# Altium PCB PMSM_G474V1.0.PcbDoc (part 1 of 2)
Units mil, origin at the board's own origin, x right, y up, seen from the top; angles counter-clockwise.
Board outline 1968.5 x 3149.61 mil, 4 copper layers (Top Layer, VCC, GND, Bottom Layer), stack 23.756 mil thick; 166 components, 95 nets, 523 pads, 254 vias.
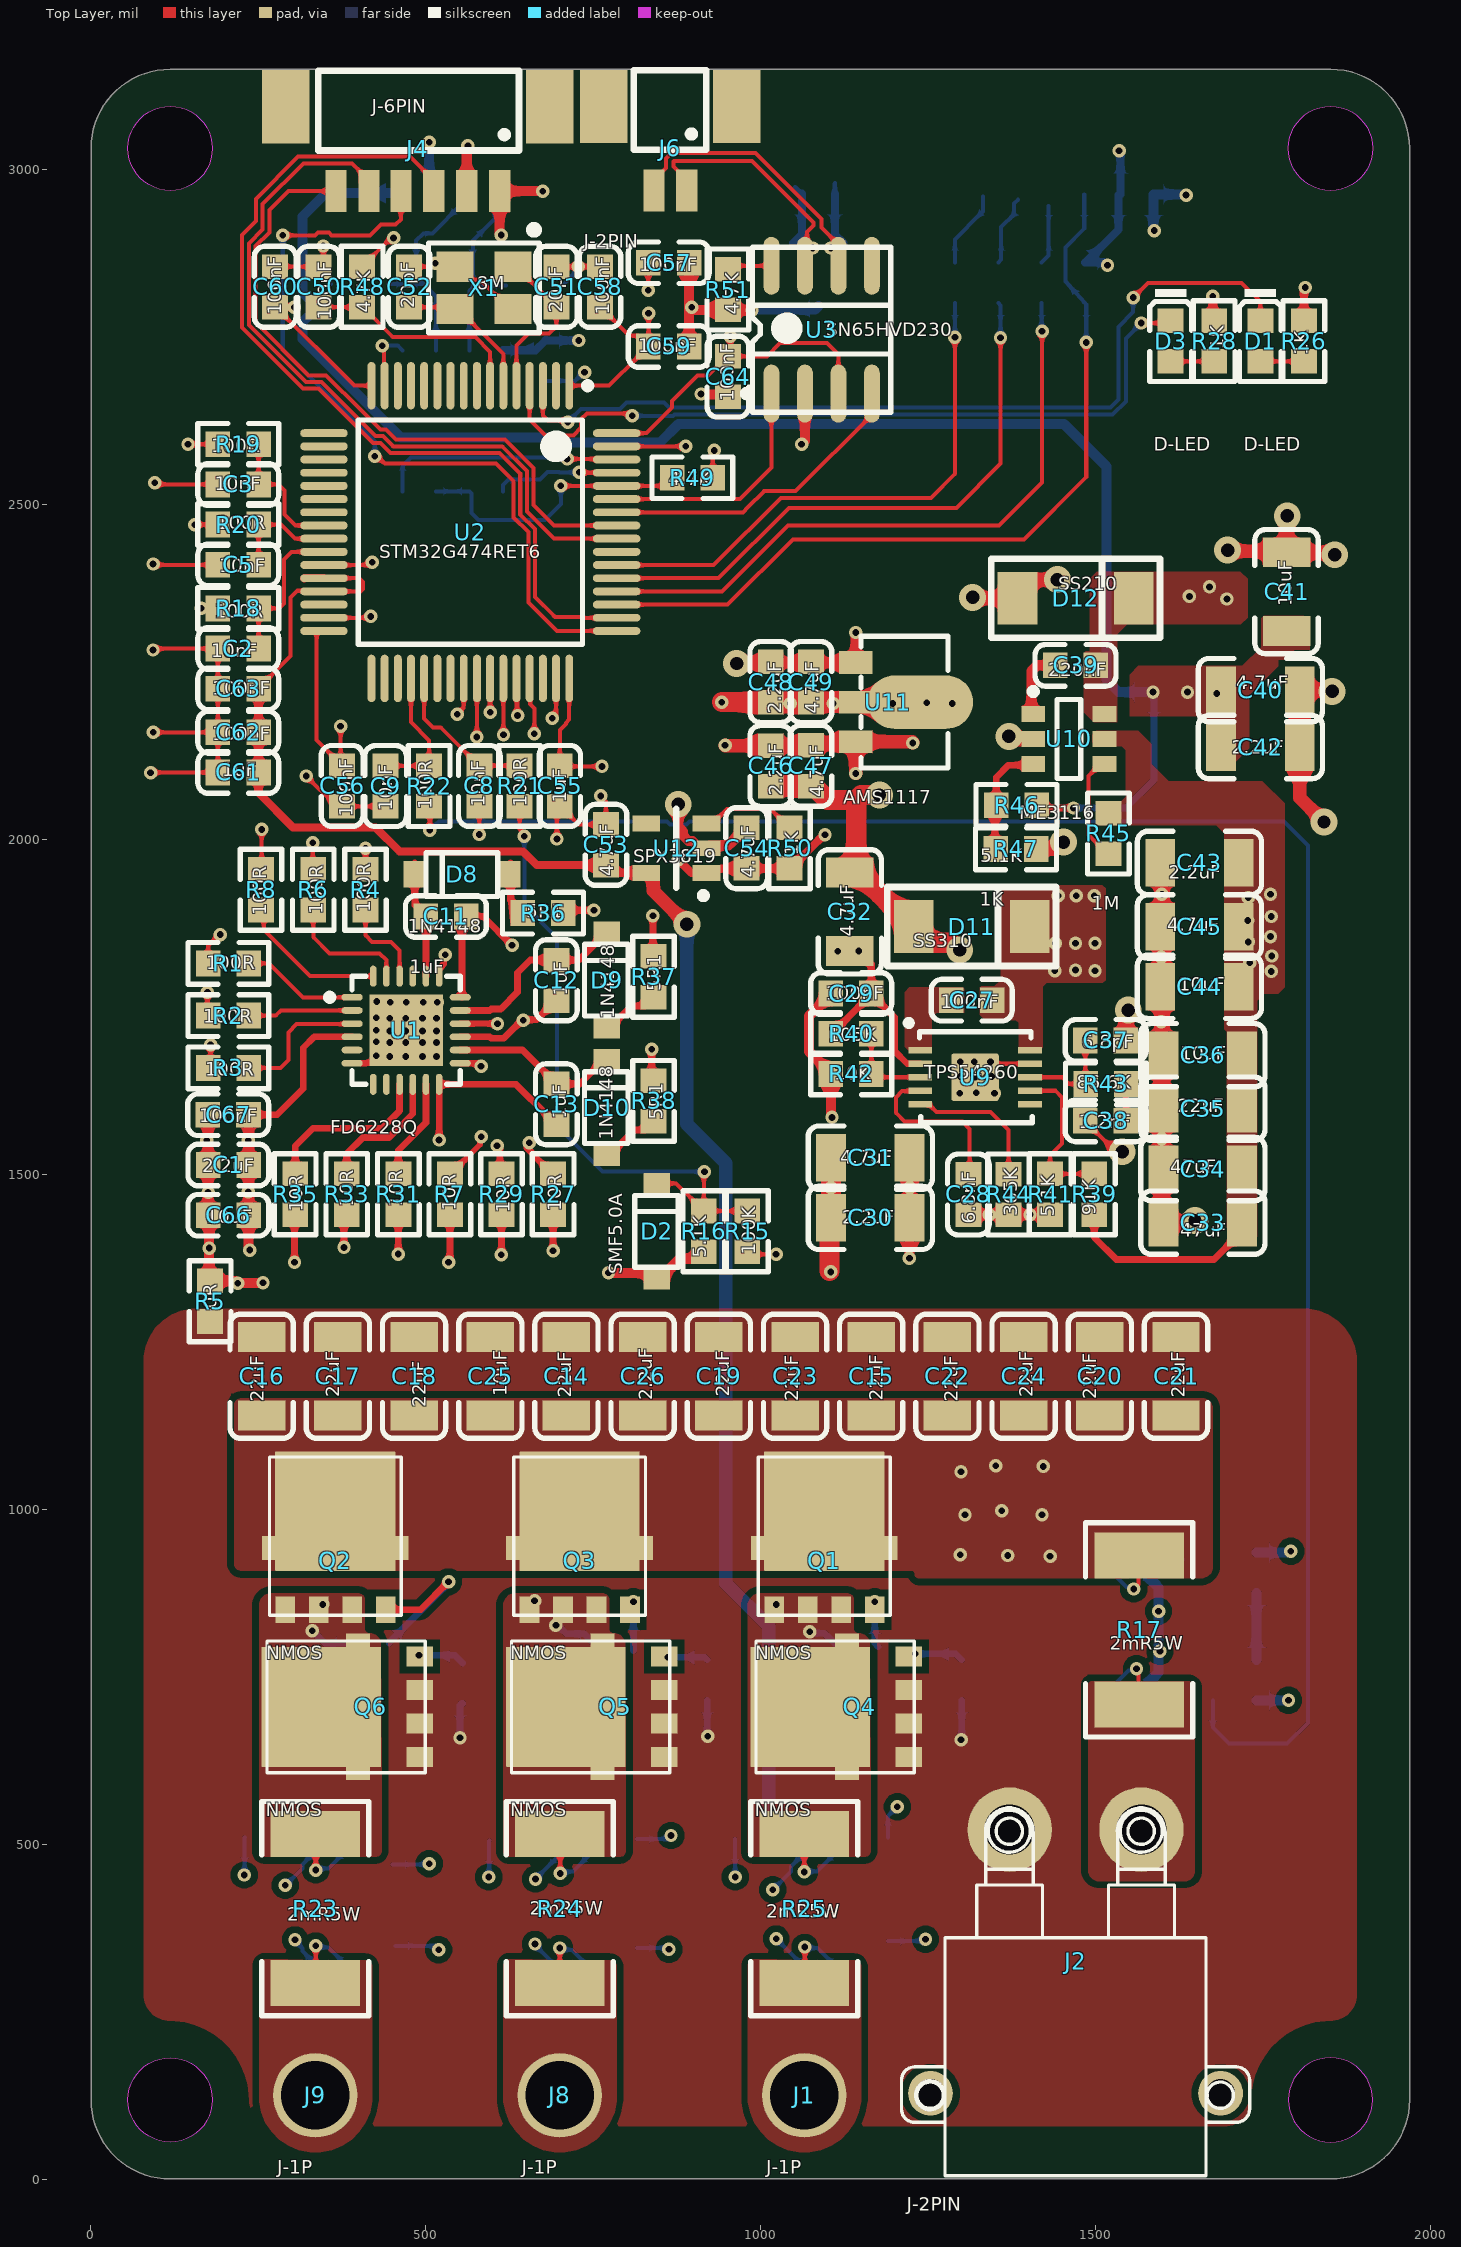
[diagram p0: Top Layer view]
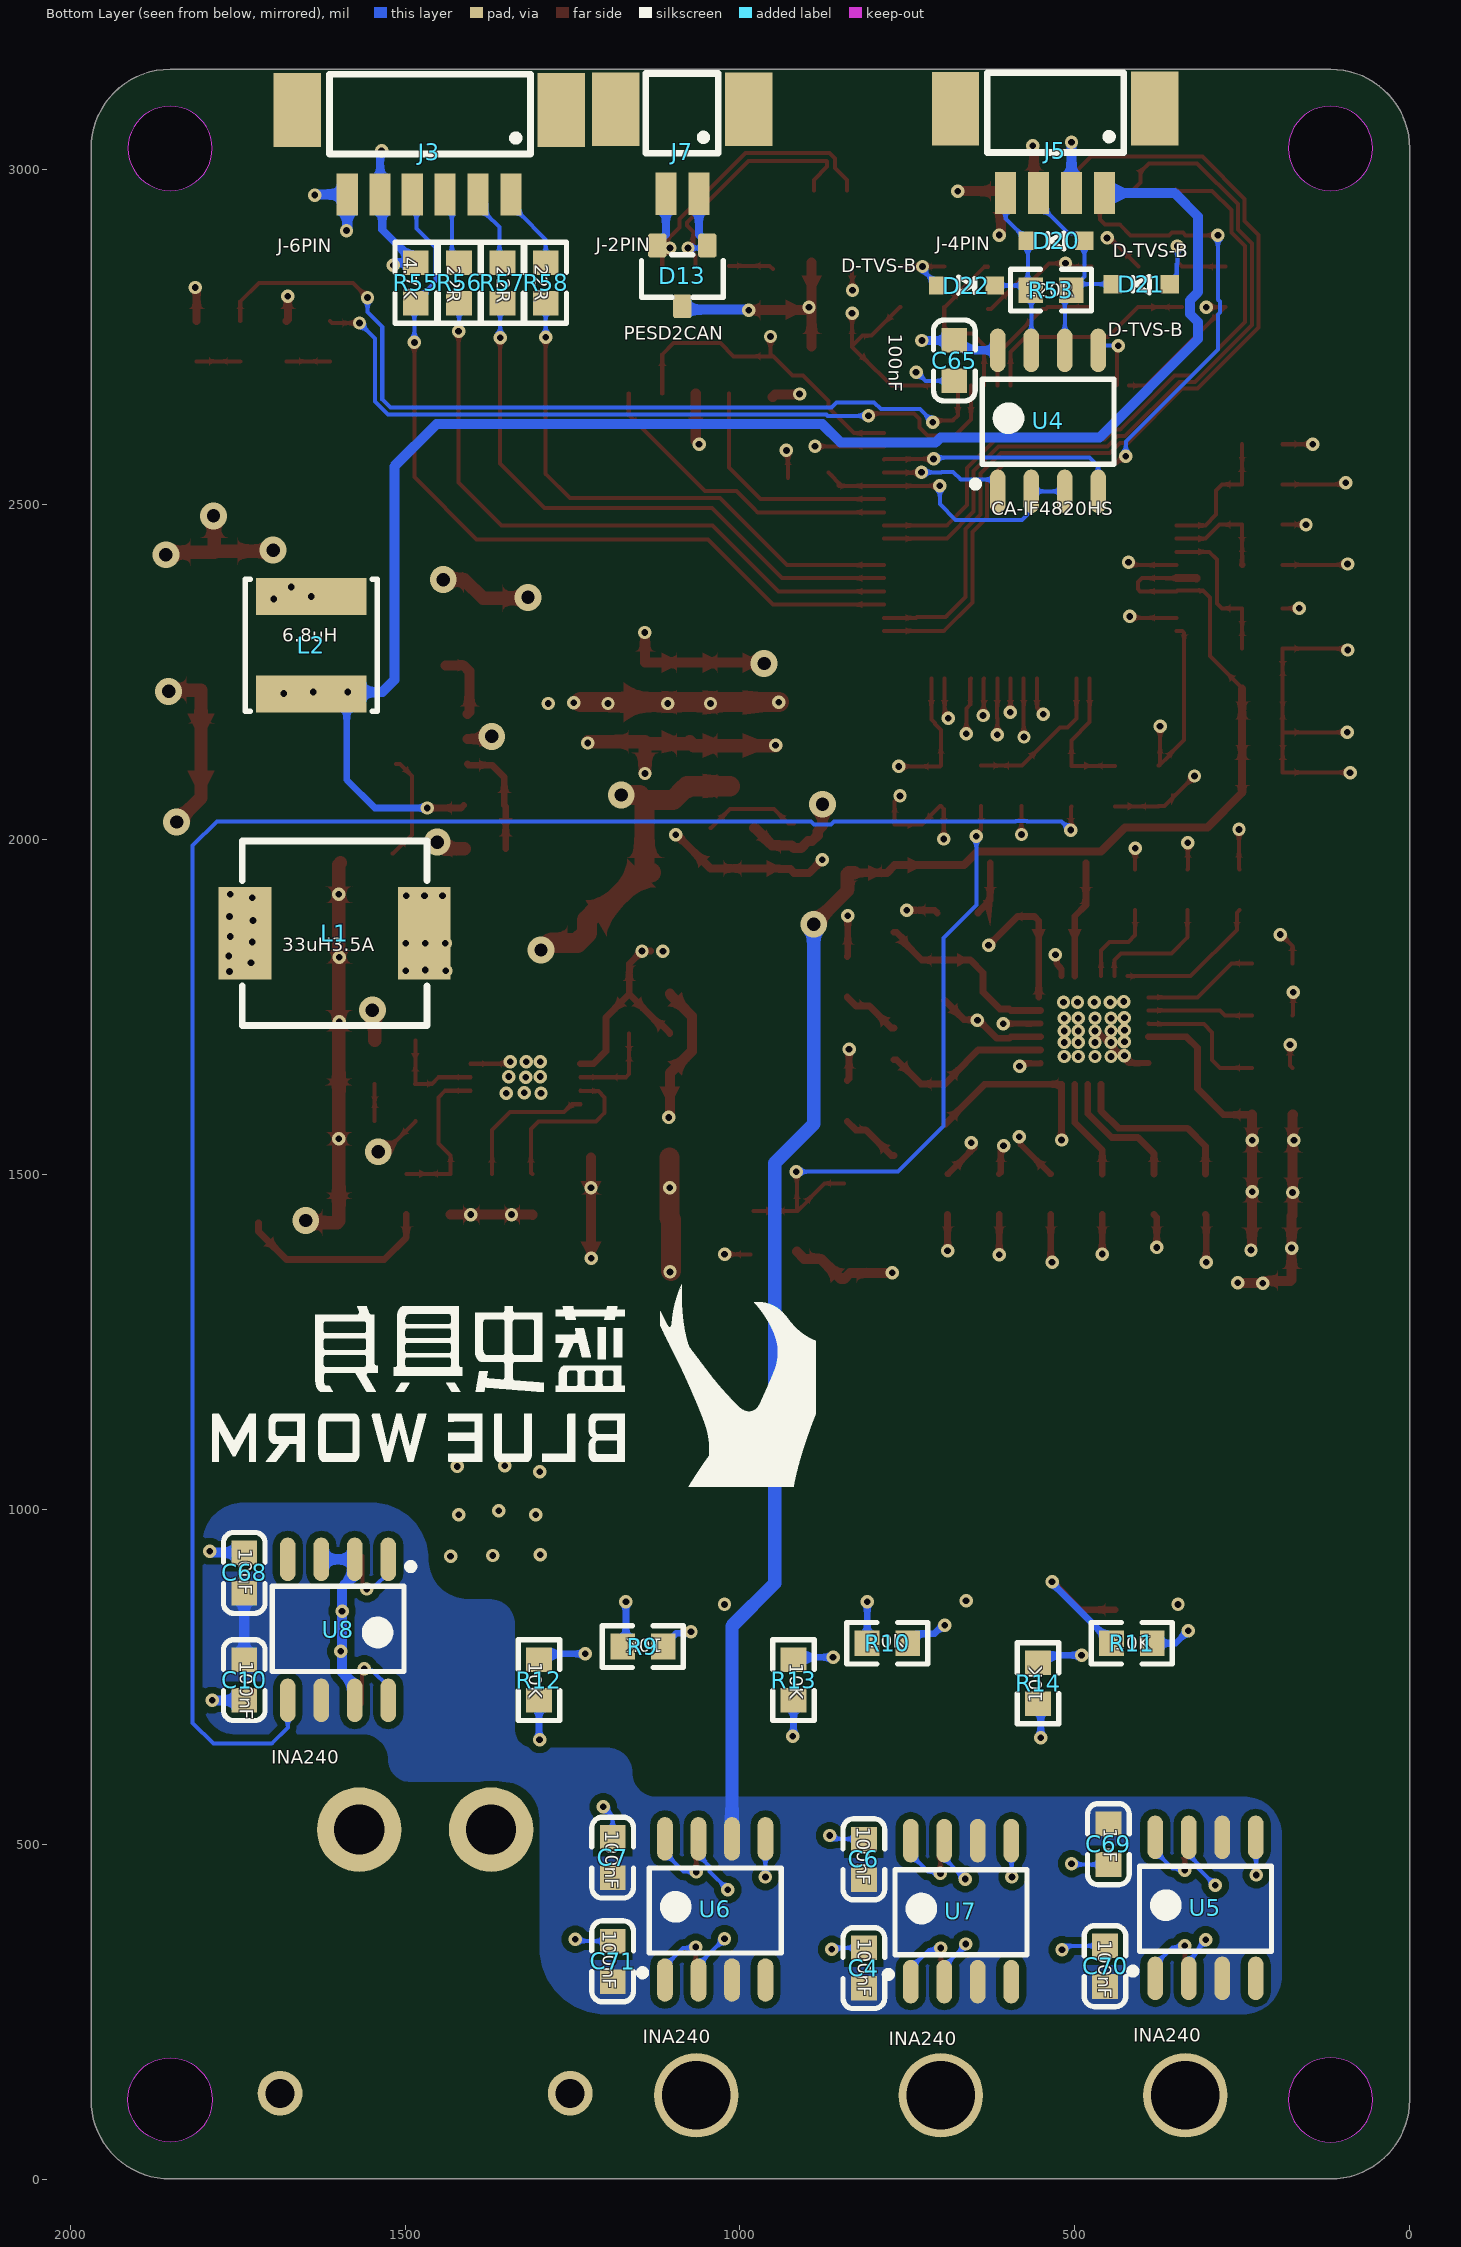
[diagram p1: Bottom Layer view, seen from below]
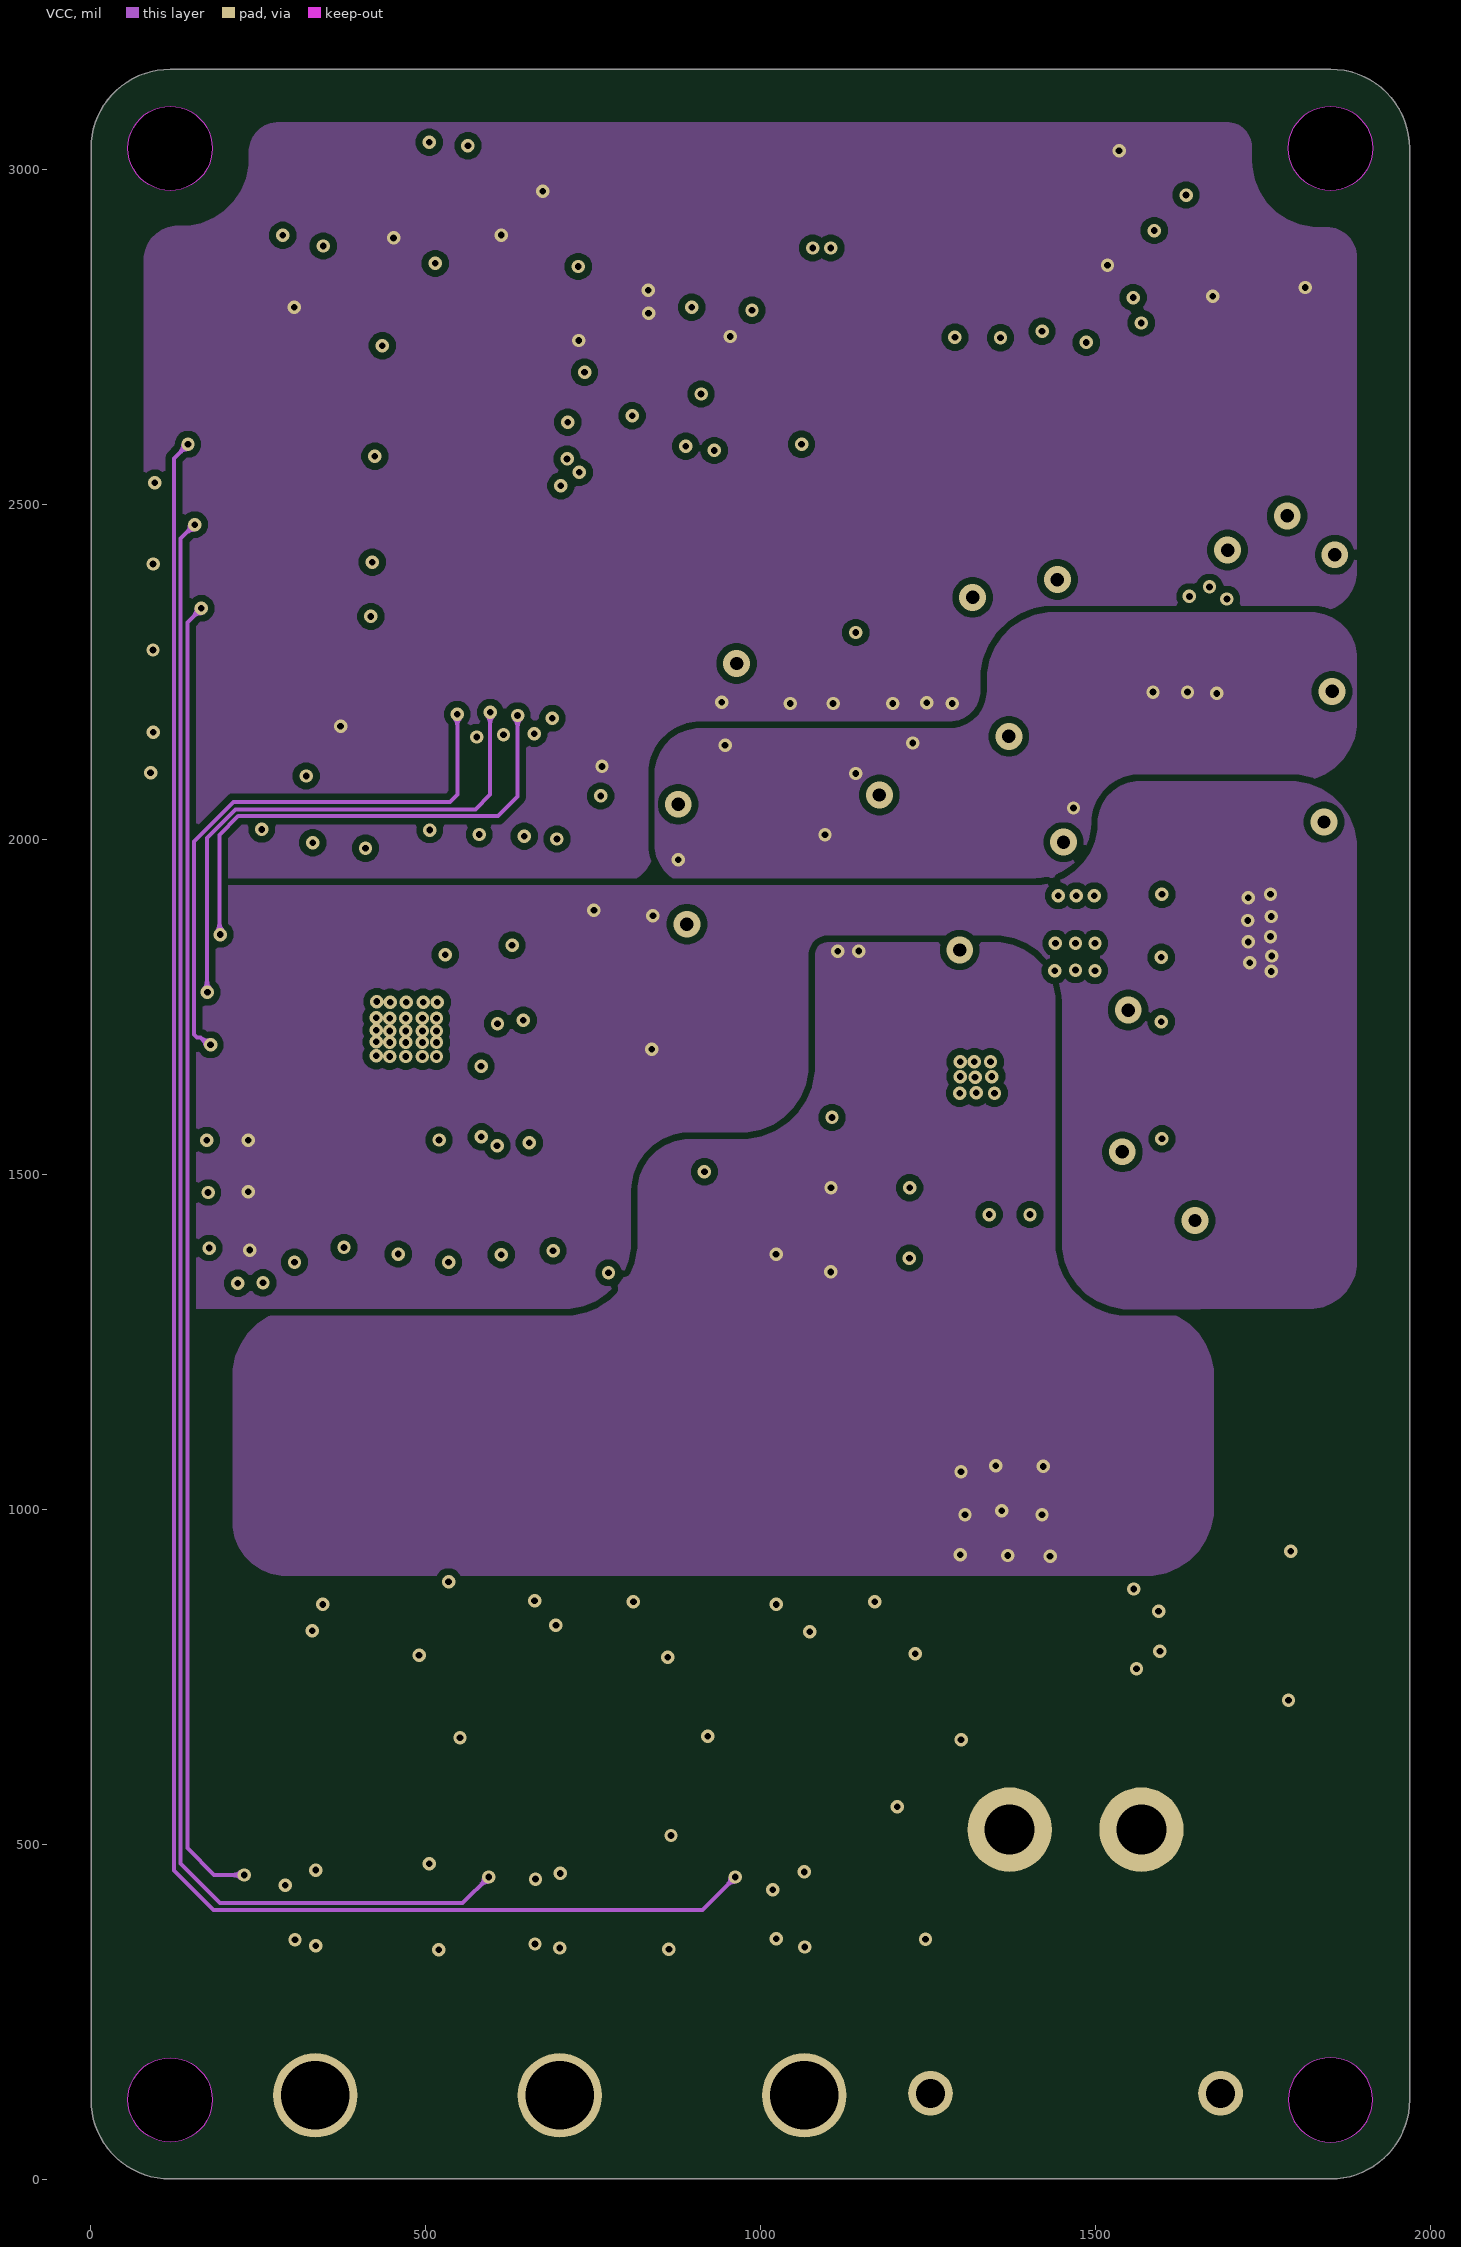
[diagram p2: VCC]
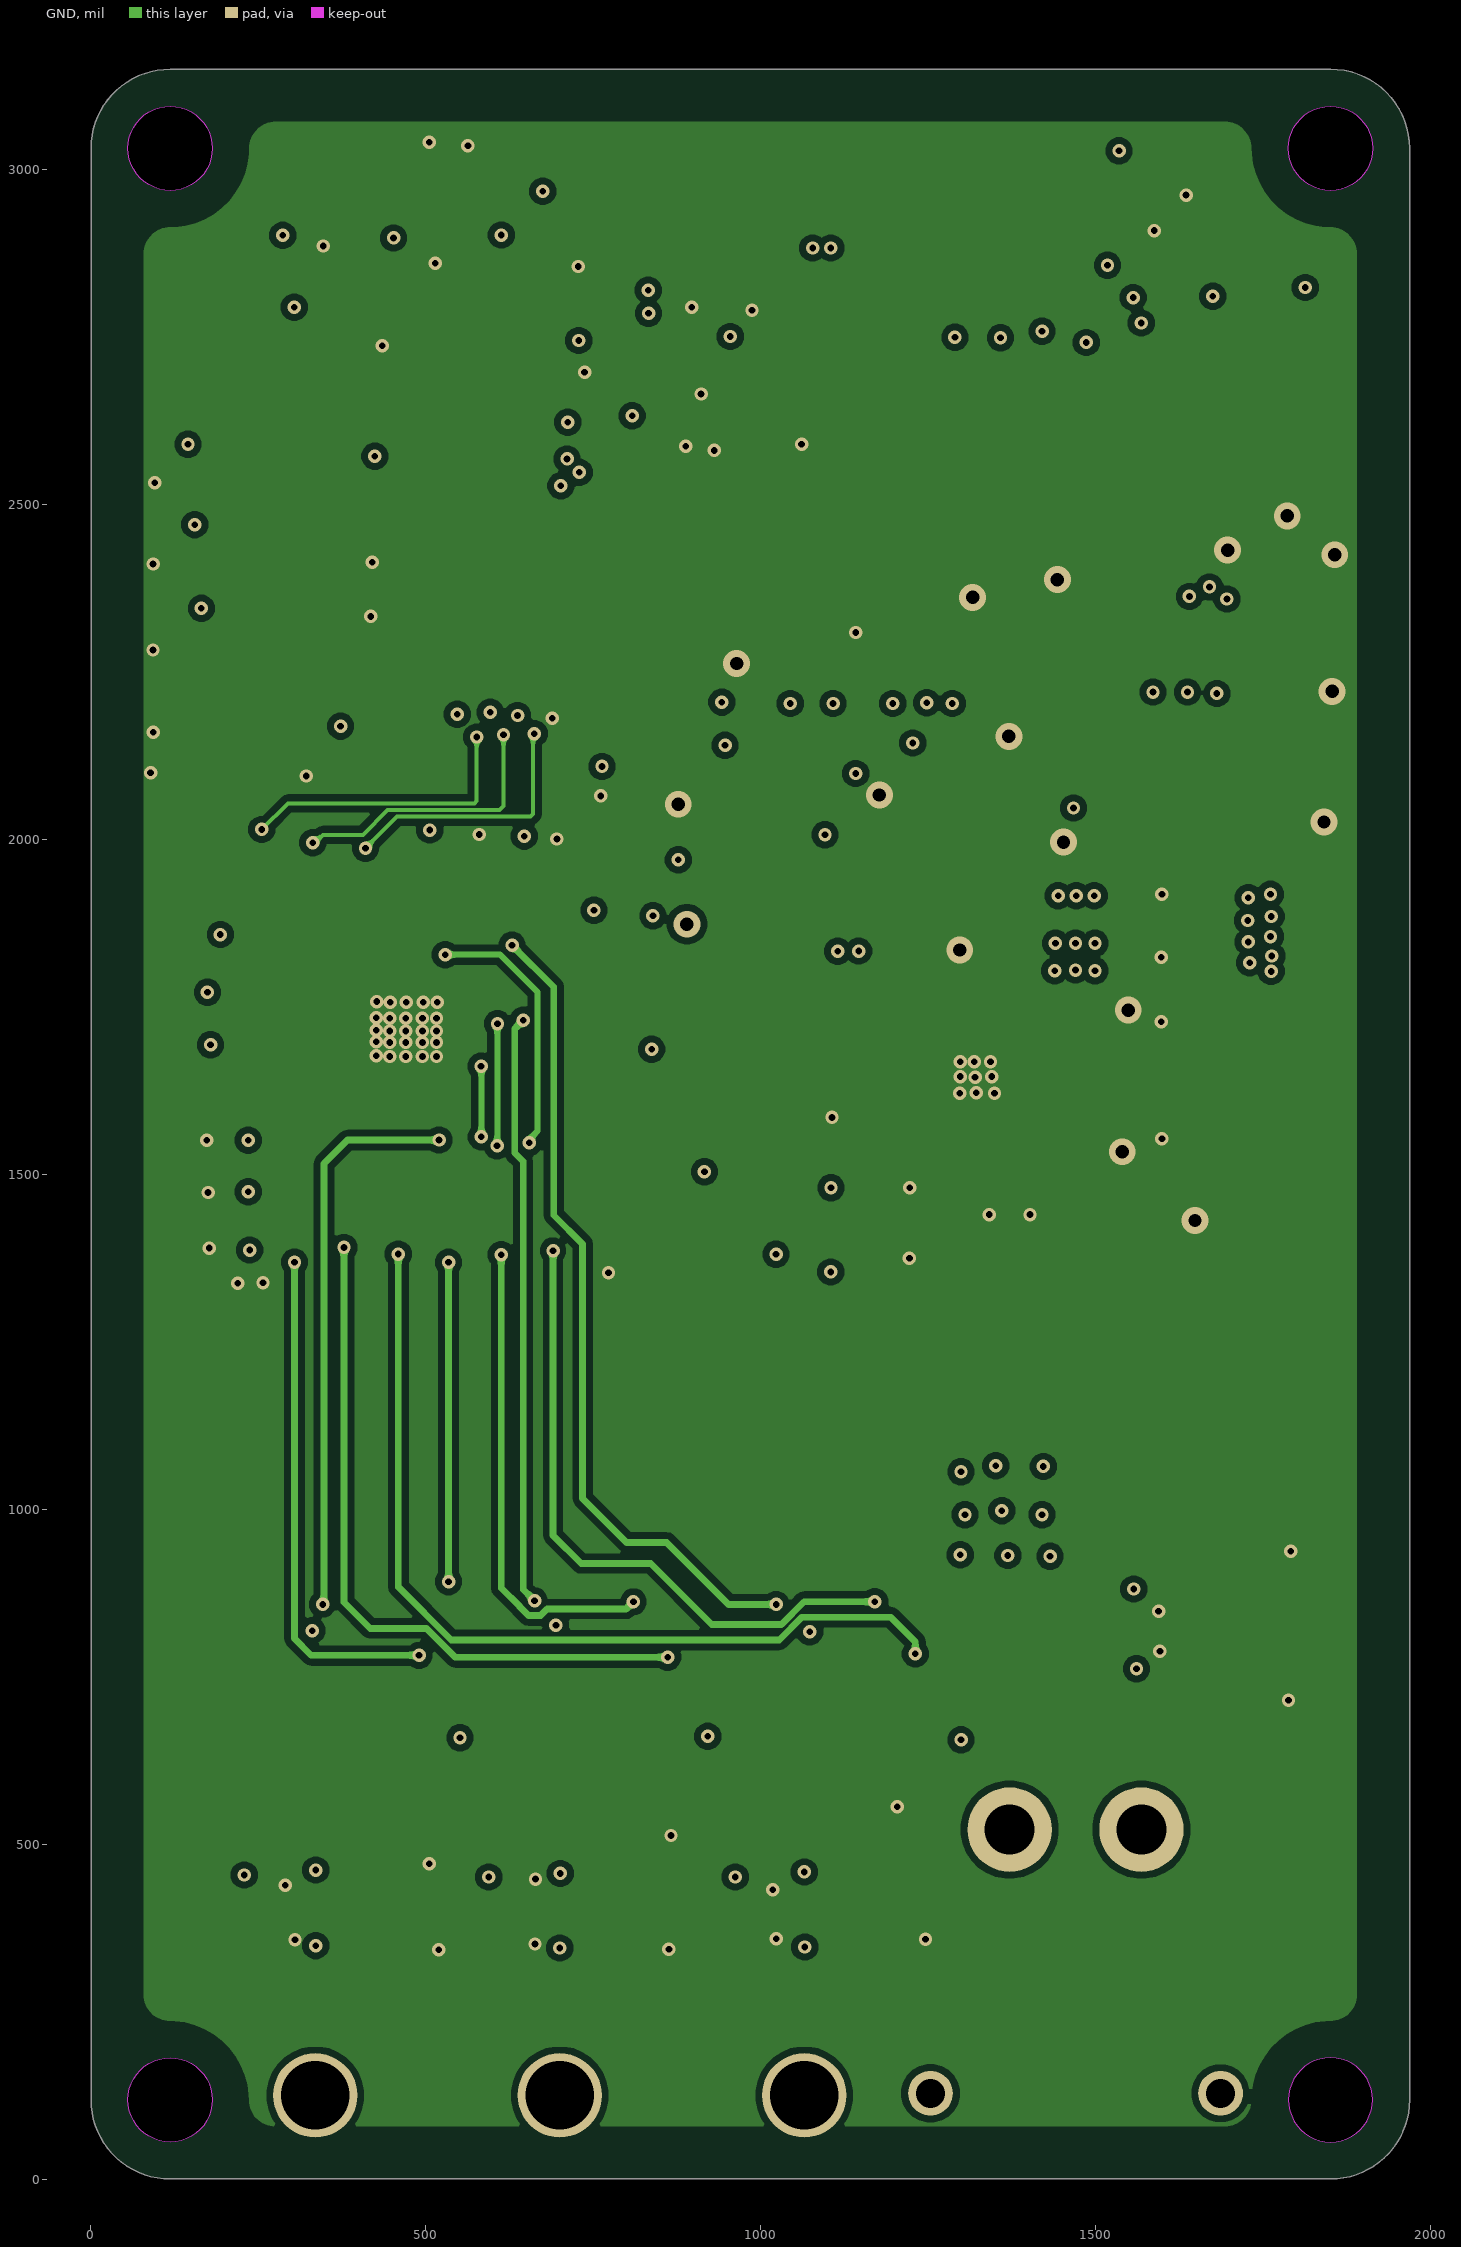
[diagram p3: GND]
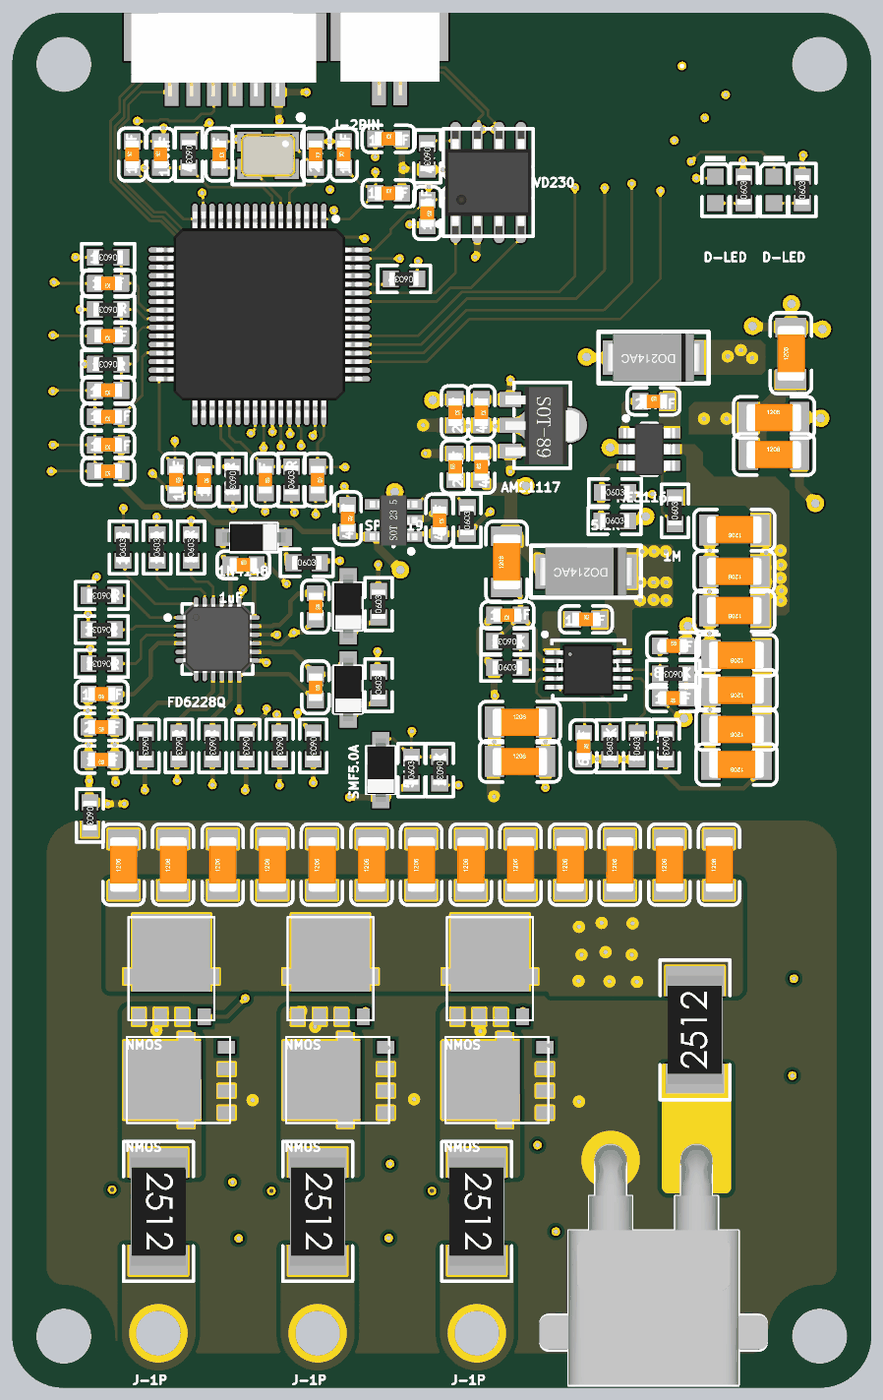
[diagram p5: 3D render of the assembled board from above, using the file's embedded part models]
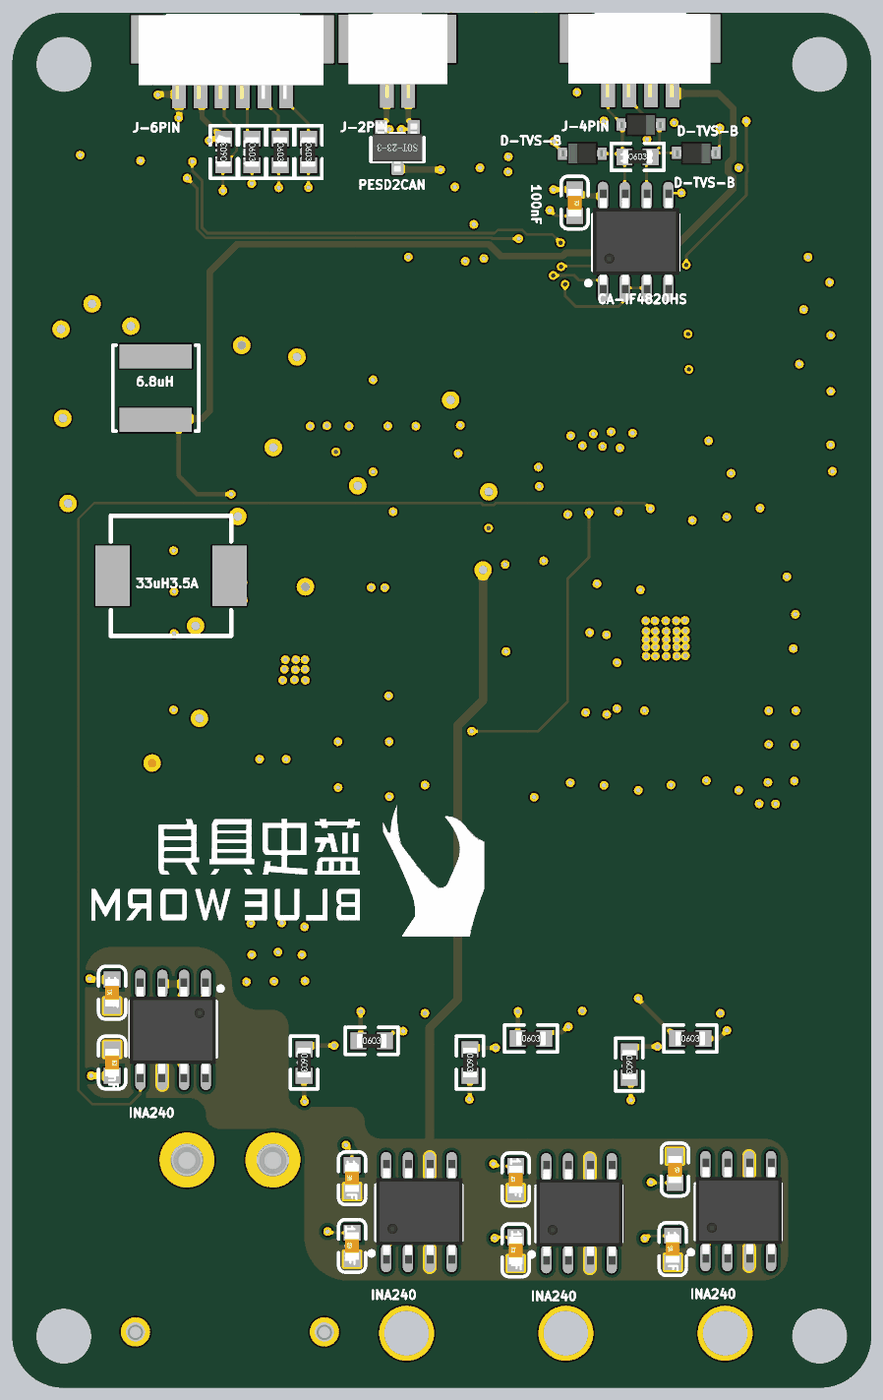
[diagram p6: 3D render of the assembled board from below, using the file's embedded part models]

## Layer stack, top to bottom
Top Solder: solder mask 0.4, Solder Resist, Dk 3.5
Top Layer: signal copper 1.4
Dielectric 2: prepreg 2.8, PP-006, Dk 4.1
VCC: signal copper 1.378
Dielectric 1: dielectric 12.6, FR-4, Dk 4.8
GND: signal copper 1.378
Dielectric 3: prepreg 2.8, PP-006, Dk 4.1
Bottom Layer: signal copper 1.4
Bottom Solder: solder mask 0.4, Solder Resist, Dk 3.5

## Board outline
0.25,118.36 0.25,3031.75 cw(c118.36,3031.75) 118.36,3149.86 1850.64,3149.86 cw(c1850.64,3031.75) 1968.75,3031.75 1968.75,118.36 cw(c1850.64,118.36) 1850.64,0.25 118.36,0.25 cw(c118.36,118.36)
cut-out: 1850.64,2968.75 cw(c1850.64,3031.75) 1787.65,3031.75 cw(c1850.64,3031.75) 1850.64,3094.74 cw(c1850.64,3031.75) 1913.64,3031.75 cw(c1850.64,3031.75)
cut-out: 1787.65,118.36 ccw(c1850.64,118.36) 1850.64,55.37 ccw(c1850.64,118.36) 1913.64,118.36 ccw(c1850.64,118.36) 1850.64,181.35 ccw(c1850.64,118.36)
cut-out: 118.36,2968.75 cw(c118.36,3031.75) 55.37,3031.75 cw(c118.36,3031.75) 118.36,3094.74 cw(c118.36,3031.75) 181.35,3031.75 cw(c118.36,3031.75)
cut-out: 118.36,55.37 cw(c118.36,118.36) 55.37,118.36 cw(c118.36,118.36) 118.36,181.35 cw(c118.36,118.36) 181.35,118.36 cw(c118.36,118.36)

## Design rules (kind name [scope] priority, off if disabled: settings)
Clearance [All] p1: gap=7 ignorepadtopadclearanceinfootprint=TRUE except(4: Arc-Arc Arc-Track Track-Track; 10: Arc-Poly Track-Poly SMDPad-Poly THPad-Poly Via-Poly Fill-Poly Poly-Poly Poly-Region Poly-Text Poly-Hole)
DiffPairsRouting [All] p1: maxlimit=10 minlimit=5.5 mostfreqgap=5.5 toplayer_minwidth=4.5 toplayer_maxwidth=20 toplayer_prefwidth=4.5 midlayer1_minwidth=4.5 midlayer1_maxwidth=20 midlayer1_prefwidth=4.5 midlayer2_maxgap=8 midlayer2_minwidth=4.5 midlayer2_maxwidth=4.5 midlayer2_prefwidth=4.5 bottomlayer_minwidth=4.5 bottomlayer_maxwidth=20 bottomlayer_prefwidth=4.5 maxuncoupledlength=500
HoleSize [All] p1: absolutevalues=TRUE maxlimit=10000 minlimit=0 maxpercent=80.000 minpercent=20.000
HoleToHoleClearance [All] p1: gap=0 allowstackedmicrovias=TRUE
MinimumSolderMaskSliver [All] p1: minsoldermaskwidth=0
PlaneConnect [All] p1: planeconnectstyle=Direct reliefexpansion=20 reliefentries=4 reliefconductorwidth=10 reliefairgap=10
PolygonConnect [All] p1: connectstyle=Direct reliefconductorwidth=10 reliefentries=4 polygonreliefangle="90 Angle" airgapwidth=10
RoutingVias [All] p1: holewidth=8 width=16 viastyle="Through Hole" minholewidth=8 minwidth=16 maxholewidth=1333 maxwidth=2000
SilkToSilkClearance [All] p1: silktosilkclearance=0
SilkToSolderMaskClearance [IsPad] p1: minsilkscreentomaskgap=0 clearancetoexposedcopper=TRUE
SolderMaskExpansion [All] p1: expansion=4 istentingtop=FALSE
SupplyNets "Schematic Supply Nets_7" [InNet('PGND')] p1: voltage=0.000
SupplyNets "Schematic Supply Nets_6" [InNet('5V')] p2: voltage=0.000
SupplyNets "Schematic Supply Nets_5" [InNet('GND')] p3: voltage=0.000
SupplyNets "Schematic Supply Nets_4" [InNet('AD_3V3')] p4: voltage=0.000
SupplyNets "Schematic Supply Nets_3" [InNet('15V')] p5: voltage=0.000
SupplyNets "Schematic Supply Nets_2" [InNet('VBAT')] p6: voltage=0.000
SupplyNets "Schematic Supply Nets_1" [InNet('3V3')] p7: voltage=0.000
SupplyNets "Schematic Supply Nets" [InNet('VIN')] p8: voltage=0.000
Width [All] p1: maxlimit=4111 minlimit=4 preferedwidth=10
23 further rules are at their usual default settings.

## Classes and differential pairs
differential pair MCU_CAN: +MCU_CAN_P -MCU_CAN_N
differential pair CAN: +CAN_P -CAN_N

## Components (designator, comment, footprint, x,y, rotation, side; value= is the part's Value field where it differs from the comment)
C1 "2.2uF" C-0603 205.32,1514 r180 top
C2 "10nF" C-0603 220,2285 r180 top
C3 "10nF" C-0603 220,2530 r180 top
C4 "100nF" C-0603 815,315 r90 bottom
C5 "10nF" C-0603 220,2410 r180 top
C6 "100nF" C-0603 815,477.43 r90 bottom
C7 "100nF" C-0603 1190,480 r90 bottom
C8 "10nF" C-0603 580,2080 r270 top
C9 "10nF" C-0603 440,2079.68 r270 top
C10 "100nF" C-0603 1740,745 r270 bottom
C11 "1uF" C-0603 530,1885 r0 top
C12 "1uF" C-0603 695,1789.68 r270 top
C13 "1uF" C-0603 695,1604.68 r270 top
C14 "22uF" C-1206 710,1198.66 r90 top
C15 "22uF" C-1206 1165,1198.66 r90 top
C16 "22uF" C-1206 255,1198.66 r90 top
C17 "22uF" C-1206 368.75,1198.66 r90 top
C18 "22uF" C-1206 482.5,1198.66 r90 top
C19 "22uF" C-1206 937.5,1198.66 r90 top
C20 "22uF" C-1206 1506.25,1198.66 r90 top
C21 "22uF" C-1206 1620,1198.66 r90 top
C22 "22uF" C-1206 1278.75,1198.66 r90 top
C23 "22uF" C-1206 1051.25,1198.66 r90 top
C24 "22uF" C-1206 1392.5,1198.66 r90 top
C25 "10uF" C-1206 596.25,1198.66 r90 top
C26 "2.2uF" C-1206 823.75,1198.66 r90 top
C27 "100nF" C-0603 1315,1760 r0 top
C28 "6.8nF" C-0603 1310,1470 r270 top
C29 "100nF" C-0603 1135,1770 r180 top
C30 "2.2uF" C-1206 1163.66,1435 r0 top
C31 "4.7uF" C-1206 1163.66,1525 r0 top
C32 "4.7uF" C-1206 1133,1892 r90 top
C33 "47uF" C-1206 1660,1428 r180 top
C34 "47uF" C-1206 1660,1508 r180 top
C35 "22uF" C-1206 1660,1598 r180 top
C36 "10uF" C-1206 1660,1678 r180 top
C37 "6.8pF" C-0603 1515,1700 r0 top
C38 "1.2nF" C-0603 1515,1580 r180 top
C39 "220nF" C-0603 1470,2260 r0 top
C40 "4.7uF" C-1206 1746,2223 r0 top
C41 "10uF" C-1206 1785,2370 r90 top
C42 "2.2uF" C-1206 1746,2138 r0 top
C43 "2.2uF" C-1206 1655,1965 r180 top
C44 "10uF" C-1206 1655,1780 r180 top
C45 "4.7uF" C-1206 1655,1870 r180 top
C46 "2.2uF" C-0603 1015,2109.68 r90 top
C47 "4.7uF" C-0603 1075,2110 r90 top
C48 "2.2uF" C-0603 1015,2235 r270 top
C49 "4.7uF" C-0603 1075,2235 r270 top
C50 "100nF" C-0603 339.96,2825 r90 top
C51 "20pF" C-0603 695,2825 r270 top
C52 "20pF" C-0603 475,2825 r270 top
C53 "4.7uF" C-0603 769,1992 r270 top
C54 "4.7uF" C-0603 979,1987 r270 top
C55 "1uF" C-0603 700,2080 r270 top
C56 "100nF" C-0603 375,2080 r270 top
C57 "100nF" C-0603 862.68,2861 r0 top
C58 "100nF" C-0603 760,2825 r90 top
C59 "100nF" C-0603 862.68,2736 r0 top
C60 "100nF" C-0603 275,2825 r90 top
C61 "1uF" C-0603 220,2100 r180 top
C62 "100nF" C-0603 220,2160 r180 top
C63 "100nF" C-0603 220,2225 r180 top
C64 "100nF" C-0603 951,2691 r270 top
C65 "100nF" C-0603 680,2715 r270 bottom
C66 "10uF" C-0603 205.32,1439 r180 top
C67 "100nF" C-0603 205,1589 r180 top
C68 "10uF" C-0603 1740,905 r90 bottom
C69 "1uF" C-0603 450,500 r270 bottom
C70 "100nF" C-0603 455,317.89 r90 bottom
C71 "100nF" C-0603 1190,325.15 r90 bottom
D1 "D-LED" D-LED-0603Blue 1746,2744 r270 top
D2 "SMF5.0A" D-SOD-123 845,1415 r270 top
D3 "D-LED" D-LED-0603Blue 1612,2744 r270 top
D8 "1N4148" D-SOD-123 554,1948 r0 top
D9 "1N4148" D-SOD-123 770,1790 r270 top
D10 "1N4148" D-SOD-123 770,1599.68 r270 top
D11 "SS310" DO-214AC(SMA) 1315,1870 r180 top
D12 "SS210" DO-214AC(SMA) 1470,2360 r180 top
D13 "PESD2CAN" SOT-233 1086,2841 r0 bottom
D20 "D-TVS-B" D-SOD-323 528,2894 r0 bottom
D21 "D-TVS-B" D-SOD-323 401,2829 r0 bottom
D22 "D-TVS-B" D-SOD-323 662,2827 r180 bottom
J1 "J-1P" PAD-1 1065,125 r0 top
J2 "J-2PIN" J-XT30-2P-F 1470,325 r0 top
J3 "J-6PIN" J-GH-6P 1464,3026 r0 bottom
J4 "J-6PIN" J-GH-6P 488,3031 r180 top
J5 "J-4PIN" J-GH-4P 388.89,2979.2 r0 bottom
J6 "J-2PIN" J-GH-2P 865,3032 r180 top
J7 "J-2PIN" J-GH-2P 1086,3027 r0 bottom
J8 "J-1P" PAD-1 700,125 r0 top
J9 "J-1P" PAD-1 335,125 r0 top
L1 "33uH3.5A" L-SMD-7.0*7.0 1605,1860 r0 bottom
L2 "6.8uH" L-SMD-5.0*5.0*4.0 1640,2290 r270 bottom
Q1 "NMOS" "SO-8FL  5*6" 1095,960 r0 top
Q2 "NMOS" "SO-8FL  5*6" 365,960 r0 top
Q3 "NMOS" "SO-8FL  5*6" 729.51,960 r0 top
Q4 "NMOS" "SO-8FL  5*6" 1111.05,705 r90 top
Q5 "NMOS" "SO-8FL  5*6" 746.05,705 r90 top
Q6 "NMOS" "SO-8FL  5*6" 381.05,705 r90 top
R1 "100R" R-0603 205.32,1815 r180 top
R2 "100R" R-0603 205.32,1737 r180 top
R3 "100R" R-0603 205.32,1659 r180 top
R4 "100R" R-0603 410,1925 r90 top
R5 "0R" R-0603 178,1310.69 r270 top
R6 "100R" R-0603 332,1925 r90 top
R7 "10R" R-0603 536,1470.32 r270 top
R8 "100R" R-0603 254,1925 r90 top
R9 "10K" R-0603 1145,795 r180 bottom
R10 "10K" R-0603 780,800 r180 bottom
R11 "10K" R-0603 415,800 r180 bottom
R12 "10K" R-0603 1300,745 r270 bottom
R13 "10K" R-0603 920,745 r270 bottom
R14 "10K" R-0603 555,740.32 r270 bottom
R15 "100K" R-0603 980,1415 r270 top
R16 "5.1K" R-0603 915,1415 r90 top
R17 "2mR5W" R-2512 1565,820 r90 top
R18 "100R" R-0603 220,2345 r180 top
R19 "100R" R-0603 220,2590 r180 top
R20 "100R" R-0603 220,2470 r180 top
R21 "100R" R-0603 640,2080 r90 top
R22 "100R" R-0603 505,2079.68 r270 top
R23 "2mR5W" R-2512 335,403.78 r270 top
R24 "2mR5W" R-2512 700,403.78 r270 top
R25 "2mR5W" R-2512 1065,403.78 r270 top
R26 "1K" R-0603 1811,2744 r90 top
R27 "10R" R-0603 690,1470.32 r270 top
R28 "1K" R-0603 1677,2744 r90 top
R29 "10R" R-0603 613,1470.32 r270 top
R31 "10R" R-0603 459,1470.32 r270 top
R33 "10R" R-0603 382,1470.32 r270 top
R35 "10R" R-0603 305,1470.32 r270 top
R36 "5R1" R-0603 675,1890 r0 top
R37 "5R1" R-0603 840,1795 r90 top
R38 "5R1" R-0603 840,1609.68 r90 top
R39 "91K" R-0603 1498,1470.32 r270 top
R40 "105K" R-0603 1135,1710 r180 top
R41 "5.1K" R-0603 1432,1470.31 r90 top
R42 "10K" R-0603 1135,1650 r0 top
R43 "86.6K" R-0603 1515.32,1635 r180 top
R44 "365K" R-0603 1370,1470 r90 top
R45 "1M" R-0603 1519,2009 r90 top
R46 "5.1K" R-0603 1382,2051 r0 top
R47 "1K" R-0603 1381,1986 r0 top
R48 "4.7K" R-0603 405,2825 r270 top
R49 "4.7K" R-0603 898,2540 r180 top
R50 "1K" R-0603 1043.02,1987 r90 top
R51 "4.7K" R-0603 951,2821 r270 top
R53 "120R" R-0603 535.69,2820 r180 bottom
R55 "4.7K" R-0603 1484,2831 r90 bottom
R56 "22R" R-0603 1419.33,2831 r270 bottom
R57 "22R" R-0603 1354.67,2831 r270 bottom
R58 "22R" R-0603 1290,2831 r270 bottom
U1 "FD6228Q" QFN-24-4X4 470.71,1715.16 r0 top
U2 "STM32G474RET6" STM-LQFP64_N 566.5,2458.9 r270 top
U3 "SN65HVD230" SOp-8 1091,2761 r90 top
U4 "CA-IF4820HS" SOIC-8(4mm) 540,2625 r90 bottom
U5 "INA240" SOIC-8(4mm) 305,405 r90 bottom
U6 "INA240" SOIC-8(4mm) 1036.93,402.57 r90 bottom
U7 "INA240" SOIC-8(4mm) 670,400 r90 bottom
U8 "INA240" SOIC-8(4mm) 1600,820 r270 bottom
U9 "TPS54260" MSOP-10 1320,1645 r0 top
U10 "ME3116" SOT-236 1460,2150 r0 top
U11 "AMS1117" SOT-89 1190,2205 r270 top
U12 "SPX3819" SOT-235 874,1987 r180 top
X1 "8M" X-SMD-3225-4P 586.69,2823.5 r180 top

## Footprints (in the part's own frame and the unit in brackets; to place one, negate y for a bottom-side part, rotate by r counter-clockwise, add the part's x,y. Pads: shape width x height; smd on the part's side, far side on the other; paste and mask are expansions set on the pad)
C-0603 [mm]
  rect 0.93x0.98 smd: 1(-0.77,0) 2(0.77,0)
  silkscreen extent -1.53,-0.79 1.54,0.79, body extent -0.8,-0.4 0.8,0.4, height 0.3
C-1206 [mm]
  rect 1.13x1.8 smd: 1(-1.49,0) 2(1.49,0)
  silkscreen extent -2.36,-1.2 2.36,1.2, body extent -1.6,-0.81 1.6,0.79, height 1
D-LED-0603Blue [mm]
  rect 0.93x0.98 smd: 1(0.77,0) 2(-0.77,0)
  silkscreen extent -1.98,-0.79 1.54,0.79, body extent -0.8,-0.4 0.8,0.4, height 0.6
D-SOD-123 [mm]
  rect 0.8x1 smd: 1(1.816,0) 2(-1.816,0)
  silkscreen extent -1.36,-0.84 1.36,0.81, body extent -1.85,-0.8 1.85,0.8, height 1.27
D-SOD-323 [mm]
  rect 0.7x0.7 smd: 1(-1.075,0) 2(1.075,0)
  silkscreen extent -0.31,-0.3 0.32,0.33, body extent -1.31,-0.65 1.29,0.7, height 1.1
DO-214AC(SMA) [mm]
  rect 1.5x2 smd: 1(2.2,0) 2(-2.2,0)
  silkscreen extent -3.2,-1.5 3.2,1.5, body extent -2.74,-1.4 2.74,1.4, height 2.41
J-GH-2P [mm]
  rect 1.8x2.8 smd: 0(-2.525,-1.601) 0(2.525,-1.601)
  rect 0.8x1.6 smd: 1(-0.626,1.601) 2(0.624,1.601)
  silkscreen extent -1.36,-2.96 1.38,0.06, body extent -2.89,-3.03 2.86,1.82, height 4.25
J-GH-4P [mm]
  rect 1.8x2.8 smd: 0(-0.199,-2.841) 0(7.349,-2.839)
  rect 0.8x1.6 smd: 1(1.699,0.361) 2(2.949,0.361) 3(4.199,0.361) 4(5.449,0.361)
  silkscreen extent 0.97,-4.2 6.15,-1.18, body extent -0.5,-4.27 7.75,0.58, height 4.25
J-GH-6P [mm]
  rect 1.8x2.8 smd: 0(-5.006,-1.601) 0(5.006,-1.599)
  rect 0.8x1.6 smd: 1(-3.108,1.601) 2(-1.858,1.601) 3(-0.608,1.601) 4(0.642,1.601) 5(1.856,1.601) 6(3.106,1.601)
  silkscreen extent -3.84,-2.96 3.78,0.06, body extent -5.29,-3 5.46,1.85, height 4.45
J-XT30-2P-F [mm]
  round 1.7 hole 1.1: 0(-5.5,-5) 0(5.5,-5)
  round 3.2 hole 1.9: 1(2.5,5) 2(-2.5,5)
  silkscreen extent -6.6,-8.12 6.6,5.82, body extent -6.65,-8.08 6.65,5.87, height 5.35
L-SMD-5.0*5.0*4.0 [mm]
  rect 1.4x4.2 smd: 1(-1.85,0) 2(1.85,0)
  silkscreen extent -2.5,-2.5 2.5,2.5, body extent -2.13,-2.2 2.24,2.31, height 3
L-SMD-7.0*7.0 [mm]
  rect 2x3.5 smd: 1(-3.4,0) 2(3.4,0)
  silkscreen extent -3.5,-3.5 3.5,3.5, body extent -3.5,-3.5 3.5,3.5, height 4.5
MSOP-10 [mm]
  rrect10% 1.8x1.8 smd: 0(0,0)
  rrect10% 0.9x0.25 smd: 1(-2.083,1.024) 2(-2.083,0.512) 3(-2.083,0) 4(-2.083,-0.512) 5(-2.083,-1.024) 6(2.083,-1.024) 7(2.083,-0.512) 8(2.083,0) 9(2.083,0.512) 10(2.083,1.024)
  silkscreen extent -2.62,-1.73 2.17,2.16, body extent -2.45,-1.5 2.45,1.5, height 1.15
PAD-1 [mm]
  round 3.2 hole 2.6: 1(0,0)
QFN-24-4X4 [mm]
  oval 0.8x0.25 smd: 1(-2.05,1.25) 2(-2.05,0.75) 3(-2.05,0.25) 4(-2.05,-0.25) 5(-2.05,-0.75) 6(-2.05,-1.25) 13(2.05,-1.25) 14(2.05,-0.75) 15(2.05,-0.25) 16(2.05,0.25) 17(2.05,0.75) 18(2.05,1.25)
  oval 0.25x0.8 smd: 7(-1.25,-2.05) 8(-0.75,-2.05) 9(-0.25,-2.05) 10(0.25,-2.05) 11(0.75,-2.05) 12(1.25,-2.05) 19(1.25,2.05) 20(0.75,2.05) 21(0.25,2.05) 22(-0.25,2.05) 23(-0.75,2.05) 24(-1.25,2.05)
  rect 2.8x2.7 smd: 25(0,0)
  silkscreen extent -3.02,-2.05 2.05,2.05, body extent -2,-1.98 2,2.02, height 1
R-0603 [mm]
  rect 0.93x0.98 smd: 1(-0.77,0) 2(0.77,0)
  silkscreen extent -1.53,-0.79 1.54,0.79, body extent -0.85,-0.4 0.85,0.4, height 0.56
R-2512 [mm]
  rect 1.75x3.4 smd: 1(-2.825,0) 2(2.825,0)
  silkscreen extent -4.06,-2.03 4.06,2.03, body extent -3.16,-1.6 3.16,1.6, height 0.62
"SO-8FL  5*6" [mm]
  rect 0.75x1 smd: 1(-1.9,-2.795) 1(-0.63,-2.795) 1(0.64,-2.795) 4(1.91,-2.795)
  rrect1% 0.52x0.905 smd: 5(-2.52,-0.45) 5(2.52,-0.45)
  rrect1% 4.56x4.53 smd: 5(0,0.935)
  silkscreen extent -2.5,-3 2.5,3, body extent -2.5,-3 2.5,3, height 0.25
SOIC-8(4mm) [mm] "SOIC, 8-Leads, Body 5.0x4.0mm (max), Pitch 1.27mm, IPC Medium Density"
  oval 1.65x0.6 smd: 1(-2.675,1.905) 2(-2.675,0.635) 3(-2.675,-0.635) 4(-2.675,-1.905) 5(2.675,-1.905) 6(2.675,-0.635) 7(2.675,0.635) 8(2.675,1.905)
  silkscreen extent -2.52,-2.5 1.57,2.88, body extent -3,-2.54 3.05,2.48, height 1.6
SOp-8 [mm] "SOP, 8-Leads, Body 5.0x4.0mm (max), Pitch 1.27mm, IPC Medium Density"
  oval 2.2x0.6 smd: 1(-2.425,1.905) 2(-2.425,0.635) 3(-2.425,-0.635) 4(-2.425,-1.905) 5(2.425,-1.905) 6(2.425,-0.635) 7(2.425,0.635) 8(2.425,1.905)
  silkscreen extent -3.13,-2.62 3.13,2.98, body extent -3.02,-2.51 3.02,2.51, height 1.6
SOT-89 [mil]
  rect 34x50 smd: 1(-59.05,-48.27) 2(0,-48.27) 3(59.05,-48.27)
  oval 80x157.48 smd: 4(0,48.27)
  silkscreen extent -98,-40 98,90, body extent -87,-59 90,110, height 59
SOT-233 [mm]
  rrect25% 0.7x0.9 smd: 1(-0.95,-1.16) 2(0.95,-1.16) 3(0,1.14)
  silkscreen extent -1.55,-0.81 1.55,0.8, body extent -1.45,-1.4 1.45,1.4, height 1.2
SOT-235 [mm] "SOT23, 5-Leads, Body 3.0x2.6mm (max), Pitch 0.95mm, IPC Medium Density"
  rect 1.05x0.6 smd: 1(-1.143,0.94) 2(-1.143,0) 3(-1.143,-0.94) 4(1.143,-0.94) 5(1.143,0.94)
  silkscreen extent -1.15,-1.5 0,1.92, body extent -1.4,-1.45 1.4,1.45, height 1.2
SOT-236 [mm]
  rect 0.9x0.6 smd: 1(-1.35,0.95) 2(-1.35,0) 3(-1.35,-0.95) 4(1.35,-0.95) 5(1.35,0) 6(1.35,0.95)
  silkscreen extent -1.47,-1.5 0.45,1.92, body extent -1.5,-1.5 1.5,1.5, height 1
STM-LQFP64_N [mm] "Thin QFP, 64-Leads, Body 10x10mm, Pitch 0.5mm, IPC Medium Density"
  oval 1.8x0.3 smd: 1(-5.55,3.75) 2(-5.55,3.25) 3(-5.55,2.75) 4(-5.55,2.25) 5(-5.55,1.75) 6(-5.55,1.25) 7(-5.55,0.75) 8(-5.55,0.25) 9(-5.55,-0.25) 10(-5.55,-0.75) 11(-5.55,-1.25) 12(-5.55,-1.75) 13(-5.55,-2.25) 14(-5.55,-2.75) 15(-5.55,-3.25) 16(-5.55,-3.75) 33(5.55,-3.75) 34(5.55,-3.25) 35(5.55,-2.75) 36(5.55,-2.25) 37(5.55,-1.75) 38(5.55,-1.25) 39(5.55,-0.75) 40(5.55,-0.25) 41(5.55,0.25) 42(5.55,0.75) 43(5.55,1.25) 44(5.55,1.75) 45(5.55,2.25) 46(5.55,2.75) 47(5.55,3.25) 48(5.55,3.75)
  oval 0.3x1.8 smd: 17(-3.75,-5.55) 18(-3.25,-5.55) 19(-2.75,-5.55) 20(-2.25,-5.55) 21(-1.75,-5.55) 22(-1.25,-5.55) 23(-0.75,-5.55) 24(-0.25,-5.55) 25(0.25,-5.55) 26(0.75,-5.55) 27(1.25,-5.55) 28(1.75,-5.55) 29(2.25,-5.55) 30(2.75,-5.55) 31(3.25,-5.55) 32(3.75,-5.55) 49(3.75,5.55) 50(3.25,5.55) 51(2.75,5.55) 52(2.25,5.55) 53(1.75,5.55) 54(1.25,5.55) 55(0.75,5.55) 56(0.25,5.55) 57(-0.25,5.55) 58(-0.75,5.55) 59(-1.25,5.55) 60(-1.75,5.55) 61(-2.25,5.55) 62(-2.75,5.55) 63(-3.25,5.55) 64(-3.75,5.55)
  silkscreen extent -5.67,-4.25 4.25,4.58, body extent -6,-6 6,6, height 1.6
X-SMD-3225-4P [mm]
  rect 1.4x1.15 smd: 1(-1.1,-0.8) 2(1.1,-0.8) 3(1.1,0.8) 4(-1.1,0.8)
  silkscreen extent -2.1,-2.35 2.1,1.7, body extent -1.6,-1.24 1.6,1.26, height 0.61

## Part data
C1 C2 C3 C4 C5 C6 C7 C8 C9 C10 C11 C12 C13 C14 C15 C16 C17 C18 C19 C20 C21 C22 C23 C24 C25 C26 C27 C28 C29 C30 C31 C32 C33 C34 C35 C36 C37 C38 C39 C40 C41 C42 C43 C44 C45 C46 C47 C48 C49 C50 C51 C52 C53 C54 C55 C56 C57 C58 C59 C60 C61 C62 C63 C64 C65 C66 C67 C68 C69 C70 C71: library part C, "Non Polarised"
D1 D3: "LED"
D2: library part D-TVS-U, "单向TVS"
D8 D9 D10 D11 D12: library part D-Schottky, "Schottky"
D13: library part D-ESD, "组合ESD二极管"
D20 D21 D22: "双向TVS"
L1 L2: library part L-SMD, "Inductor"
R1 R2 R3 R4 R5 R6 R7 R8 R9 R10 R11 R12 R13 R14 R15 R16 R17 R18 R19 R20 R21 R22 R23 R24 R25 R26 R27 R28 R29 R31 R33 R35 R36 R37 R38 R39 R40 R41 R42 R43 R44 R45 R46 R47 R48 R49 R50 R51 R53 R55 R56 R57 R58: library part R, "Resistor"
U1: "三相栅极驱动器"
U2: "ARM Cortex-M4 32-bit MCU+FPU, 512 kB Flash, 128 kB Internal RAM, 51 I/Os, 64-pin UFQFPN, -40 to 85 degC, Tray"
U4: "485 半双工 非隔离 ±15V共模 50M"
U5 U6 U7 U8: "具有PWM抑制功能的电流检测IC"
U9: "3.5V-60V 2A Step-Down DCDC Convertor"
U10: "DC-DC BUCK CONVERTER 40V VINmax 1A IOUTmax"
U11 U12: "LDO"
X1: library part Crystal-4p, "Crystal Oscillator"
J5: LatestRevisionDate=17-Jul-2002, LatestRevisionNote="Re-released for DXP Platform.", Publisher="Altium Limited"

## Via types
v1: diameter 20, hole 10, Top Layer to Bottom Layer, 237 vias
v2: diameter 40, hole 20, Top Layer to Bottom Layer, 17 vias

## Nets (pads, with @x,y where several pads share a name; then routed paths per layer and width w, separated by ;. In a path a pad name is that pad's centre, name@x,y a point inside that pad or via, vN(x,y) a via of type N, cw(c..) or ccw(c..) an arc to the next point about the centre after c; other vN are vias at no path point)
3V3: C48.2 C49.2 C55.1 C56.1 C57.1 C58.1 C59.1 C60.1 C64.1 C65.1 J3.5 J4.1 R26.2 R28.2 R48.1 R55.2 U2.1 U2.16 U2.32 U2.48 U2.64 U3.3 U4.8 U11.2 U11.4 | length 2450.3
  Top Layer w6: v1(303.67,2794.69) C60.1@275,2794.69 275.98,2794.69 393.27,2677.4 U2.16@418.86,2677.4 ; U2.32@347.99,2311.26 339.68,2311.26 337,2308.58 337,2148.32 358.71,2126.61 358.71,2125.62 374.02,2110.32 C56.1@375,2110.32 372.8,2112.52 v1(372.8,2169.19) ; R48.1@405,2855.31 447.69,2898 v1(451.9,2898) ; U2.48@714.13,2240.39 714.13,2179.13 709,2174 709,2172.72 700,2163.72 C55.1@700,2110.32 701.32,2109 v1(763,2109) ; U2.1@714.13,2677.4 773.77,2677.4 816.08,2719.71 817.06,2719.71 832.37,2735.02 C59.1@832.37,2736 ; C58.1@760,2794.69 760.98,2794.69 803.38,2752.29 817.06,2752.29 832.37,2736.98 C59.1@832.37,2736 ; U2.64@785,2606.54 829.43,2606.54 867.57,2644.68 867.57,2654.35 905.72,2692.49 921.19,2692.49 950.02,2721.32 C64.1@951,2721.32 ; v1(832,2820) 832.37,2820.37 C57.1@832.37,2861 ; v1(832.6,2785.62) 832.6,2736.23 C59.1@832.37,2736 ; v1(954.46,2750.92) 954.46,2724.78 C64.1@951,2721.32 ; U3.3@1116,2665.53 1116,2724 1099,2741 1029,2741 1009.32,2721.32 C64.1@951,2721.32
  Top Layer w12: v1(1675,2811) 1675,2776.31 R28.2@1677,2774.31 ; R26.2@1811,2774.31 1811,2822 v1(1813,2824)
  Top Layer w15: v1(612.84,2902.27) 610.35,2904.76 J4.1@610.35,2967.97 674.33,2967.97 v1(674.73,2967.57)
  Top Layer w30: v1(942,2205) U11.4@1238.27,2205
  Bottom Layer w12: U4.8@615,2730.32 664.02,2730.32 679.02,2745.32 C65.1@680,2745.32 680.44,2744.87 v1(728.32,2744.87) ; v1(1517.67,2857.34) 1513.69,2861.32 R55.2@1484,2861.32 1484.98,2861.32 1534,2910.33 J3.5@1534,2962.04 ; v1(1535,3028) 1537.07,3025.93 J3.5@1537.07,2962.97
  other v1: 1044,2203 1108,2203 1197,2203 1286,2203 1248,2204
5V: C40.1 C41.1 C42.1 C46.2 C47.2 C54.2 J5.1 L2.2 R46.2 R50.1 U11.3 U12.1 | length 2954.8
  Top Layer w10: R46.2@1412.32,2051 1416.32,2047 v1(1467,2047)
  Top Layer w12: v1(877.08,1969.56) 896.64,1950 U12.1@919,1950 924.81,1955.81 940.83,1955.81 941.71,1956.69 R50.1@1043.02,1956.69 1044,1956.69 1094.31,2007 v1(1096,2007)
  Top Layer w20: v1(946.79,2140.42) 946.79,2140 C46.2@1015,2140 1015.16,2140.16 1069.21,2140.16 1075,2145.95 1077.82,2143.13 1138.92,2143.13 U11.3@1141.73,2145.95 ; v1(1141.73,2098.43) U11.3@1141.73,2145.95 ; v1(1227,2144) ccw(c1225.05,2144) 1225.05,2145.95 U11.3@1141.73,2145.95
  Bottom Layer w10: v1(1467,2047) 1545,2047 1587,2089 1587,2218.58 v1(1585.58,2220)
  Bottom Layer w15: J5.1@455.79,2965 351,2965 316,2930 316,2817 328.17,2804.83 328.17,2784.54 316,2772.37 316,2747 463,2600 700.35,2600 707.79,2592.57 849.57,2592.57 877,2620 1453,2620 1516,2557 1516,2238 1534,2220 v1(1585.58,2220)
  other v1: 1681,2218 1637.17,2220
15V: C1.1 C33.1 C34.1 C35.1 C36.1 C43.1 C44.1 C45.1 C66.1 C67.1 L1.2 R36.2 R37.2 R38.2 R39.2 R45.2 U1.4 U10.5 | length 896.6
  Top Layer w10: C67.1@235.32,1589 278,1589 317,1628 317,1689 333.31,1705.31 U1.4@390,1705.31 ; R36.2@705.32,1890 709.56,1894.25 v1(751,1894.25) ; v1(837.11,1686.72) 837.11,1642.89 R38.2@840,1640 ; v1(839.08,1886.08) 839.08,1826.24 R37.2@840,1825.32 ; R39.2@1498,1440 1498,1406 1531,1373 1676.85,1373 1718.66,1414.81 C33.1@1718.66,1428
  Top Layer w15: C67.1@235.32,1589 235.47,1588.84 235.47,1439.16 C66.1@235.63,1439 235.63,1388.37 v1(237,1387)
  other v1: 235,1474 235,1551 1762,1803 1730,1816 1763,1826 1728,1847 1761,1855 1727,1879 1762,1885 1728,1913 1761,1918
AD_3V3: C4.1 C6.1 C7.1 C10.1 C53.2 C61.1 C62.1 C63.1 C68.1 C69.1 C70.1 C71.1 U2.28 U2.29 U5.3 U5.6 U6.3 U6.6 U7.3 U7.6 U8.6 U12.5 | length 2776.1
  Top Layer w6: C63.1@250.32,2225 250.32,2225.98 298,2273.67 298,2361 308.35,2371.35 346.96,2371.35 U2.29@347.99,2370.32 402.49,2370.32 406,2373.83 406,2384 400,2390 U2.28@347.99,2390
  Top Layer w12: C63.1@250.32,2225 C62.1@250.32,2160 C61.1@250.32,2100 250.32,2069.68 301.94,2018.06 424.94,2018.06 461,1982 645.31,1982 665.63,1961.68 C53.2@769,1961.68 780.68,1950 U12.5@829,1950 ; U2.28@318.56,2389.91 318.65,2390 U2.28@347.99,2390
  Top Layer w20: U12.5@829,1950 837.86,1950 839.67,1948.19 839.67,1923.67 v2(889.85,1873.49)
  Bottom Layer w15: C10.1@1740,775.32 C68.1@1740,874.69
  Bottom Layer w20: v2(889.85,1873.49) 889.85,1575.15 948,1517 948,889.63 1011.93,825.7 U6.6@1011.93,507.89
CAN_N: D13.2 J6.2 J7.2 U3.6 | length 546.5
  Top Layer w6: J6.2@840.43,2968.97 840.43,2984.71 858.37,3002.65 858.37,3016.86 865.98,3024.48 991.95,3024.48 1090.41,2926.02 1090.41,2913.56 1116,2887.97 U3.6@1116,2871.5 ; v1(1104.5,2883) U3.6@1116,2871.5 ; U3.6@1116,2856.47 U3.6@1116,2871.5
  Bottom Layer w6: v1(1104.5,2883) 1119.73,2883 D13.2@1123.4,2886.67 ; J7.2@1110.57,2963.97 J7.2@1110.57,2979.71
  Bottom Layer w12: J7.2@1110.57,2963.97 1110.57,2903.44 1123.4,2890.61 D13.2@1123.4,2886.67
CAN_P: D13.1 J6.1 J7.1 U3.7 | length 503.6
  Top Layer w6: J6.1@889.64,2968.97 889.64,2984.71 869.87,3004.49 869.87,3012.1 870.75,3012.98 987.19,3012.98 1078.91,2921.26 1078.91,2916.29 1069.37,2906.75 U3.7@1069.37,2874.87 ; U3.7@1066,2856.47 1066,2871.5 U3.7@1069.37,2874.87 ; v1(1077.5,2883) U3.7@1069.37,2874.87
  Bottom Layer w6: D13.1@1048.6,2886.67 1052.27,2883 v1(1077.5,2883) ; J7.1@1051.32,2974 J7.1@1061.36,2963.97
  Bottom Layer w12: D13.1@1048.6,2890.61 1061.36,2903.36 J7.1@1061.36,2963.97
CURR_BUS: C9.1 R22.1 U2.36 | length 206.6
  Top Layer w6: C9.1@440,2110 R22.1@505,2110 505,2148 477.91,2175.09 U2.36@477.91,2240.39
CURR_U: C3.1 R19.1 U2.24 | length 204.1
  Top Layer w6: R19.1@250.31,2590 C3.1@250.32,2530 280,2530 289,2521 289,2485 305.26,2468.74 U2.24@347.99,2468.74
CURR_V: C5.1 R20.1 U2.25 | length 166.4
  Top Layer w6: C5.1@250.32,2410 R20.1@250.31,2470 284,2470 304.94,2449.06 U2.25@347.99,2449.06
CURR_W: C2.1 R18.1 U2.26 | length 231
  Top Layer w6: C2.1@250.32,2285 R18.1@250.31,2345 280.49,2345 288,2352.51 288,2418 299.37,2429.37 U2.26@347.99,2429.37
FB: R39.1 R41.2 U9.7 | length 239.9
  Top Layer w6: U9.7@1402,1624.85 1440.15,1624.85 1450,1615 1450,1546 1432,1528 R41.2@1432,1500.63 R39.1@1498,1500.63
GND: C1.2 C2.2 C3.2 C4.2 C5.2 C6.2 C7.2 C8.2 C9.2 C10.2 C28.2 C29.2 C30.2 C31.2 C32.2 C33.2 C34.2 C35.2 C36.2 C37.2 C38.2 C40.2 C41.2 C42.2 C43.2 C44.2 C45.2 C46.1 C47.1 C48.1 C49.1 C50.2 C51.1 C52.1 C53.1 C54.1 C55.2 C56.2 C57.2 C58.2 C59.2 C60.2 C61.2 C62.2 C63.2 C64.2 C65.2 C66.2 C67.2 C68.2 C69.2 C70.2 C71.2 D2.1 D11.1 D12.1 D13.3 D21.1 D22.1 J3.6 J4.2 J5.2 R5.1 R16.1 R41.1 R42.1 R44.1 R47.2 R49.1 R51.2 U1.6 U1.25 U2.15 U2.27 U2.31 U2.47 U2.63 U3.2 U4.5 U5.2 U5.7 U6.2 U6.7 U7.2 U7.7 U8.2 U8.3 U8.7 U9.0 U9.9 U10.2 U11.1 U12.2 X1.2 X1.4 | length 7307.2
  Top Layer w6: v1(89.11,2099.39) 89.72,2100 C61.2@189.69,2100 C62.2@189.69,2160 ; v1(92.8,2282.78) 95.01,2285 C2.2@189.69,2285 C63.2@189.69,2225 C62.2@189.69,2160 ; v1(92.89,2411.22) 94.1,2410 C5.2@189.69,2410 ; v1(93.27,2160.04) v1(93.27,2160.04) C62.2@189.69,2160 ; v1(95.56,2532.36) 97.92,2530 C3.2@189.69,2530 ; C60.2@275,2855.32 C50.2@339.96,2855.32 347,2862.36 v1(347,2886) ; v1(321.36,2094.72) 366.39,2049.69 C56.2@375,2049.69 375.32,2049.37 C9.2@440,2049.37 ; U2.31@347.99,2330.94 415.94,2330.94 v1(418,2333) ; U2.27@347.99,2409.69 415.69,2409.69 v1(420,2414) ; v1(435.19,2737.19) 437.43,2734.95 437.43,2678.51 U2.15@438.54,2677.4 ; C52.1@475,2855.32 503.29,2855.32 505.3,2857.32 511.32,2857.32 v1(514,2860) 538.38,2860 563.01,2835.36 581.71,2835.36 625.08,2792 X1.4@630,2792 ; v1(579.73,2007.33) 580,2007.59 C8.2@580,2049.69 ; v1(689,2181) 694.45,2186.45 U2.47@694.45,2240.39 ; C51.1@695,2855.32 v1(727.5,2855.32) C58.2@760,2855.32 ; v1(695.74,2000.7) 695.74,2045.42 C55.2@700,2049.69 700.98,2049.69 728.36,2022.31 C53.1@769,2022.31 769,2057 v1(761,2065) ; U2.63@785,2586.85 887.85,2586.85 v1(888,2587) ; R49.1@928.31,2540 928.31,2578.49 v1(930.58,2580.76) ; v1(1343,1668) 1345.85,1665.15 U9.9@1402,1665.15 ; C38.2@1484.69,1580 1484.69,1579.02 1523.49,1540.21 1533.39,1540.21 v2(1539.89,1533.71)
  Top Layer w9: U1.6@390,1665.94 419.53,1665.94 468.74,1715.16 U1.25@470.71,1715.16
  Top Layer w15: C67.2@174.69,1589 174.84,1588.84 174.84,1439.16 C66.2@175,1439 176.5,1437.5 v1(176.5,1390) 176.5,1342.5 R5.1@178,1341 215.85,1341 v1(219.42,1337.44) 219.98,1338 v1(257,1338) ; J4.2@561.14,2967.97 561.14,3034.05 v1(562.88,3035.79) ; v1(772.76,1352.94) 835.56,1352.94 D2.1@845,1343.5 848.93,1343.5 879.31,1373.88 904.19,1373.88 R16.1@915,1384.69 ; v2(876.83,2052.5) 876.83,2019.17 883.83,2012.17 883.83,2006.18 892.32,1997.69 898.31,1997.69 909,1987 U12.2@919,1987 923.31,1991.31 952.01,1991.31 978.02,2017.31 C54.1@979,2017.31 ; C59.2@893,2736 v1@893,2798.5 ; C57.2@893,2861 v1@893,2798.5 ; v1(911,2665) 911.96,2664.04 947.64,2664.04 C64.2@951,2660.69 ; v2(964,2262.7) 965.35,2264.05 U11.1@1141.73,2264.05 1141.73,2308.73 v1(1142,2309) ; v1(987,2790) 986.66,2790.34 951.34,2790.34 R51.2@951,2790.68 900.82,2790.68 v1@893,2798.5 ; v1(1061,2590) 1066,2595 U3.2@1066,2665.53 ; C29.2@1104.69,1770 1104.69,1769.02 1071.88,1736.21 1071.88,1683.79 1104.69,1650.98 R42.1@1104.69,1650 1104.69,1586.82 v1(1106.49,1585.01) ; v1(1222,1375) 1222.32,1375.32 C30.2@1222.32,1435 C31.2@1222.32,1525 ; C28.2@1310,1439.69 1310.16,1439.84 1431.84,1439.84 R41.1@1432,1440 ; v2(1370.52,2153.9) 1374.42,2150 U10.2@1406.85,2150
  Top Layer w20: v2(1316.38,2361.39) 1317.76,2360 D12.1@1383.39,2360 1411.39,2388 v2(1443,2388) ; R47.2@1411.32,1986 1442,1986 v2(1452,1996) ; C37.2@1545.32,1700 1545.32,1741.92 v2(1548.66,1745.26) ; C43.2@1596.34,1965 1598.84,1962.5 1598.84,1430.5 C33.2@1601.34,1428 1645.2,1428 v2(1648.36,1431.16) ; v2(1697,2432) 1698.67,2430.33 1783.33,2430.33 C41.2@1785,2428.66 ; v2(1786,2483) 1785,2482 C41.2@1785,2428.66 ; v2(1841,2026) 1804.66,2062.34 C42.2@1804.66,2138 C40.2@1804.66,2223 1851,2223 v2(1853,2221) ; v2(1857,2425) 1853.34,2428.66 C41.2@1785,2428.66
  Top Layer w30: C46.1@1015,2079.37 1079.29,2079.37 1079.29,2076.38 1082.28,2076.38 1100.01,2058.66 1142.66,2058.66 ; v2(1177.13,2066.43) 1150.09,2066.43 1142.66,2059 1142.66,1957.91 1135.41,1950.66 C32.2@1133,1950.66 1146.19,1950.66 1202.48,1894.37 1213.86,1894.37 1228.39,1879.84 1228.39,1860.16 1242.91,1845.63 1283.66,1845.63 1294.29,1835 v2(1297,1835)
  Bottom Layer w6: v1(290.25,438.51) 315.73,463.98 315.73,469.69 327.44,481.41 328.41,481.41 330,483 U5.7@330,510.32 ; v1(304.74,357.54) 304.74,355.6 315.73,344.61 315.73,340.31 327.44,328.59 330,328.59 U5.2@330,299.69 ; v1(347,2886) 347,2860.11 347.9,2859.21 347.9,2839.78 D21.1@358.68,2829 ; v1(435.19,2737.19) 458.12,2737.19 U4.5@465,2730.32 ; C69.2@450,469.69 503.69,469.69 v1(505,471) ; C70.2@455,348.2 513.3,348.2 v1(519.16,342.34) ; v1(663,351) 663,349.18 695,317.18 U7.2@695,294.69 ; v1(663.75,447.92) 695,479.17 U7.7@695,505.32 ; C65.2@680,2684.69 722.89,2684.69 735.6,2697.4 v1(737.04,2697.4) ; D22.1@704.32,2827 724.82,2847.5 724.82,2852.64 v1(727.5,2855.32) ; C4.2@815,345.31 860.69,345.31 v1(863,343) ; C6.2@815,507.74 860.74,507.74 v1(866,513) ; v1(1018,432) 1045.16,459.16 1045.16,466.88 1056.87,478.59 1057.59,478.59 1061.93,482.93 U6.7@1061.93,507.89 ; v1(1023,359) 1061.93,320.07 U6.2@1061.93,297.26 ; C71.2@1190,355.46 1243.46,355.46 v1(1246,358) ; C7.2@1190,510.32 1190,542 v1(1204,556)
  Bottom Layer w15: J5.2@505,2965 505,3040.74 v1(505.06,3040.81) ; v1(987,2790) 987.96,2790.96 1080.84,2790.96 D13.3@1086,2796.12 ; U8.7@1575,714.69 1575,737.69 1594,756.69 1594,883.31 1575,902.31 U8.2@1575,925.32 U8.3@1625,925.32 ; v1(1587.41,2909) 1586.28,2910.13 J3.6@1586.28,2962.97 1634.03,2962.97 v1(1635,2962) ; C10.2@1740,714.69 1787.69,714.69 v1(1788,715) ; C68.2@1740,935.32 1789.49,935.32 v1(1791.52,937.35)
  other v1: 1596,788 1594,848 1341,1440 1402,1440 175,1473 1222.32,1480 173,1551 1599,1553 1297,1621 1349,1621 1322,1622 1320,1645 1298,1646 1345,1646 1298,1668 1319,1668 446,1676 470,1676 495,1676 516,1676 426,1677 446,1697 470,1697 495,1697 516,1697 426,1698 446,1714 470,1714 495,1714 516,1714 426,1715 1598,1728 446,1733 470,1733 495,1733 516,1733 426,1734 447,1757 471,1757 496,1757 517,1757 427,1758 1598,1824 1599,1918 896.91,2794.59